# EAGLE board Bulk Board 4 (EAGLE 8.3.0)
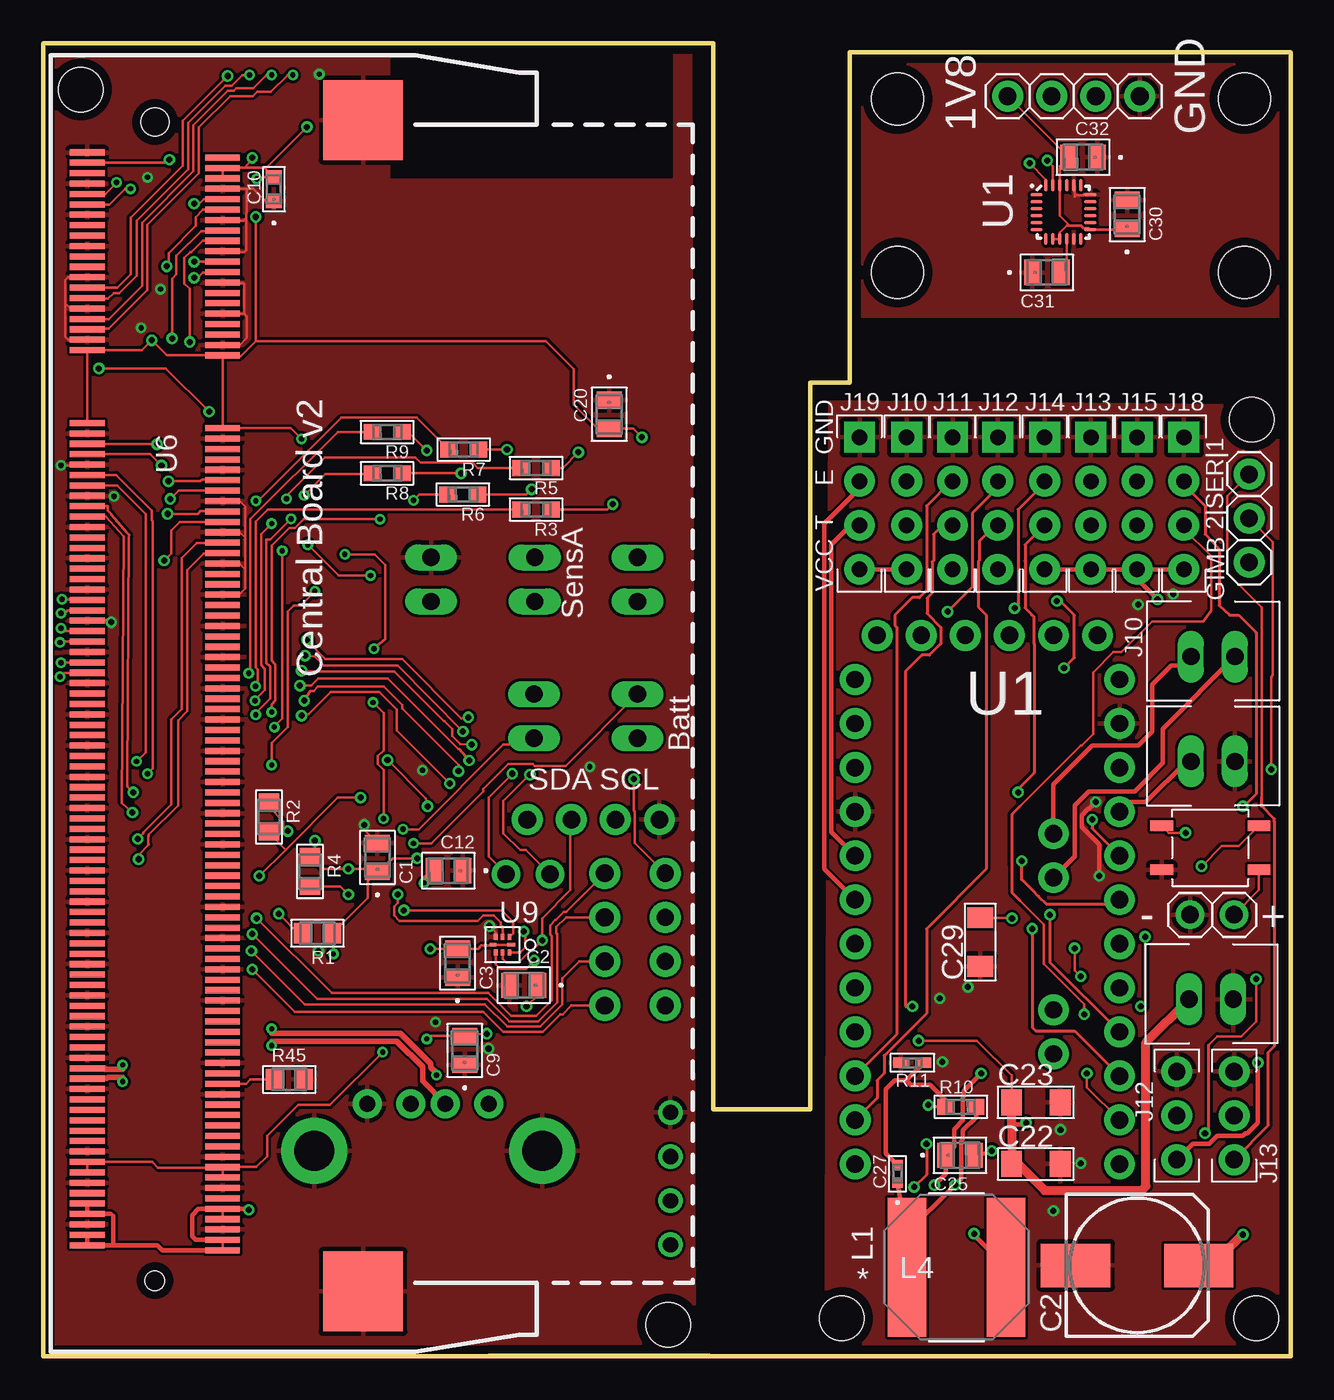
[diagram p0: board, top side]
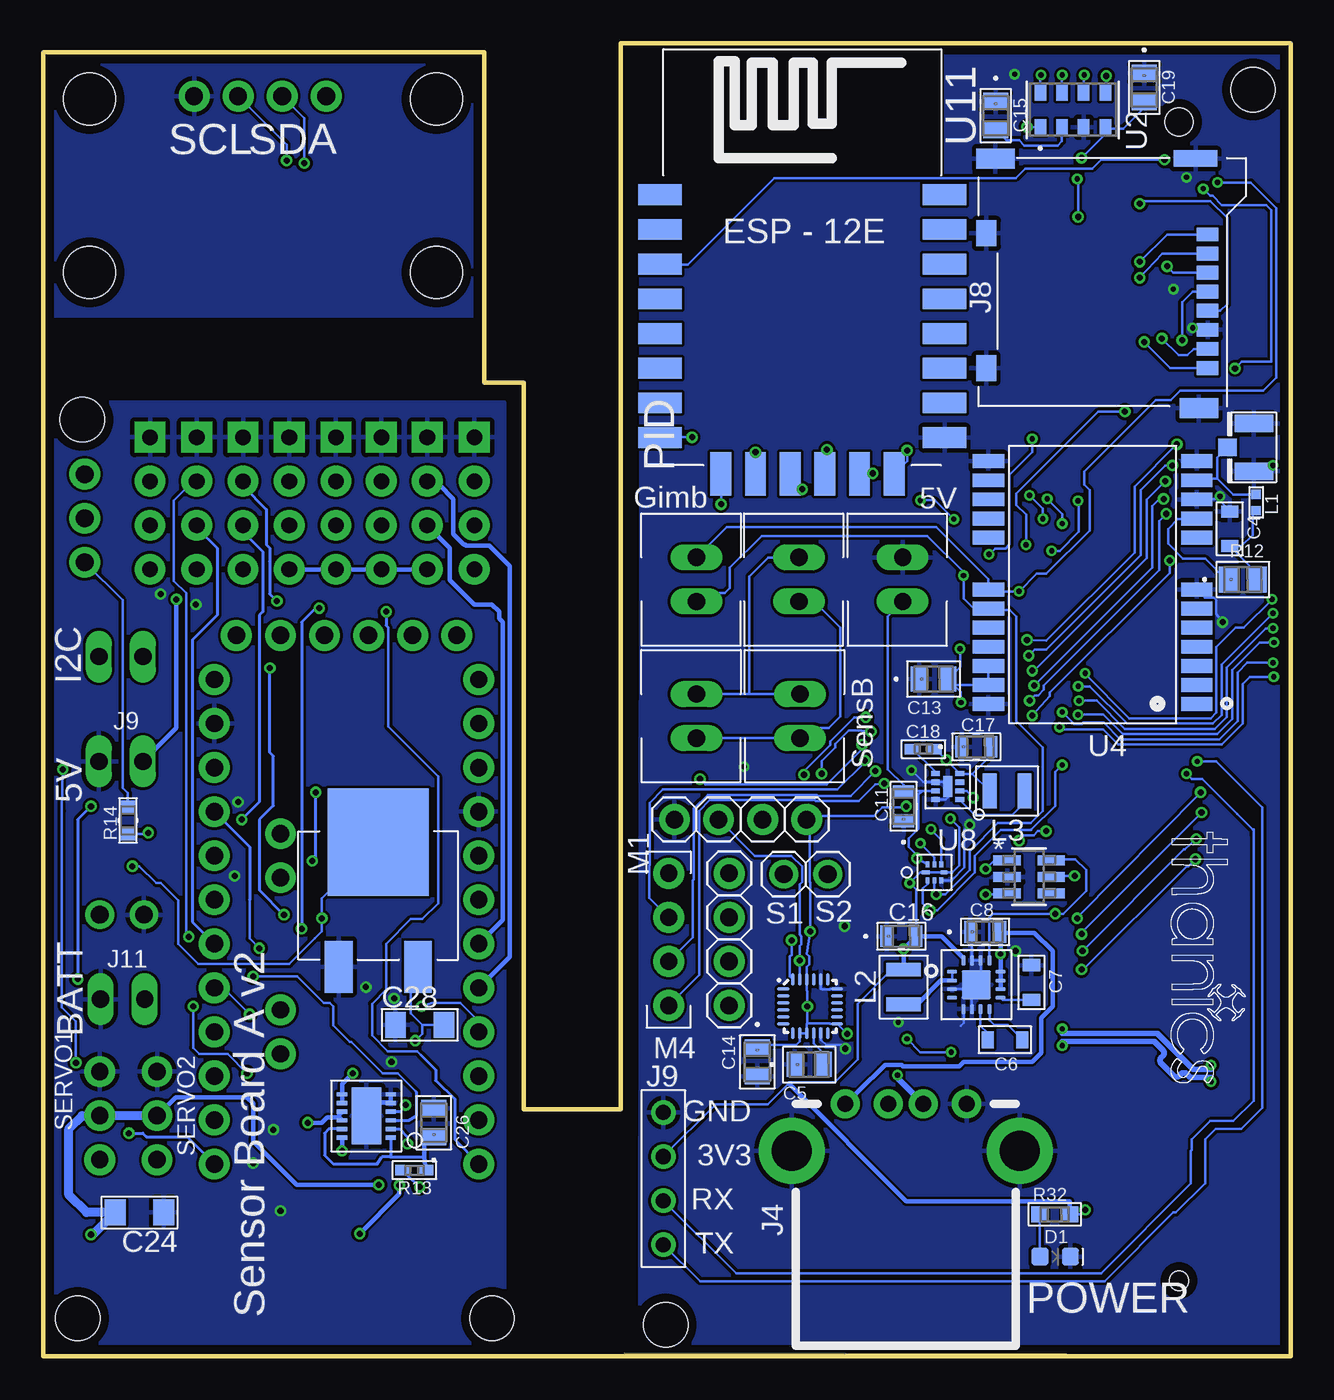
[diagram p1: board, bottom side, seen from below]

Size 71.88 x 75.69 mm. Coordinates in mm from the lower left corner, seen from the top.
Outline: 0.13,0.08 38.41,0.15
Outline: 0,0 71.88,0 71.88,75.18 46.48,75.18 46.48,56.13 44.2,56.13 44.2,14.22 38.61,14.22 38.61,75.69 0,75.69 0,0
Copper layers (1*16): Top 0.035mm / dielectric 1.6mm / Bottom 0.035mm
Design rules "Elecrow_2-layer_PCB_eagle_rule": minimum track width 6mil, minimum drill 12mil, track to track 6mil, track to pad 6mil, pad to pad 6mil, via to via 8mil, smd to smd 0mil, copper to edge 20mil, drill to drill 10mil, minimum pad ring 6mil, minimum via ring 6mil, stop-mask expansion 0mil, vias tented up to drill 100mil, thermal gap 10mil
Holes 2.54 mm at 36.02,1.8 2.16,73.03 69.9,2.18 69.65,54 46.02,2.18
Holes 3 mm at 49.23,72.48 49.23,62.48 69.23,72.48 69.23,62.48

## Footprints (pad centres in the part's own frame; a part is rotated, then mirrored left to right if it is on the bottom)
0805 = smd 0.965 x 1.448: 1 -0.826,0; 2 0.826,0
0603_CAPACITOR = smd 0.701 x 1.001: 1 -1.001,0; 2 1.001,0
G-21 = smd 0.711 x 1.245: 1 -0.851,0; 2 0.851,0
G-188-M = smd 0.813 x 0.914: 1 -0.699,0; 2 0.699,0
YAG_CC0805 = smd 0.965 x 1.448: 1 -0.826,0; 2 0.826,0
CC0402N-M = smd 0.864 x 0.61: 1 -0.635,0; 2 0.635,0
0810_POLCAP = smd 4 x 2.5: + 3.55,0; - -3.55,0
1206_MLCC = smd 1.2 x 1.5: P$1 -1.4,0; P$2 1.4,0
G-155-M = smd 0.559 x 0.61: 1 -0.521,0; 2 0.521,0
LED-0603 = smd 1 x 1: A -0.877,0; C 0.877,0
XH_CONNECTOR = drill 1.001 long: 1 -1.27,0; 2 1.27,0
USB_A_RECEPT = drill 0.92 pad 1.676: 1 -3.5,0; 2 -1,0; 3 1,0; 4 3.5,0 | drill 2.3 pad 3.81: 5 -6.57,-2.71; 6 6.57,-2.71
U.FL = smd 2.2 x 1: P$1 0,1.375; P$2 0,-1.375 | smd 1.05 x 1: P$3 1.525,0
MICROSD = smd 0.8 x 1.24: 1 -4.4,0; 2 -3.3,0; 3 -2.2,0; 4 -1.1,0; 5 0,0; 6 1.1,0; 7 2.2,0; 8 3.3,0 | smd 0.95 x 2.5: 9 -8.775,-0.7 | smd 1.15 x 2.2: 10 5.615,-0.5; 11 -8.775,-12.23 | smd 1.5 x 1.15: 12 -4.47,-12.755; 13 3.31,-12.775
4_PIN_TELE_CONNECTOR = drill 0.87 pad 1.422: 1 0,3.81; 2 0,1.27; 3 0,-1.27; 4 0,-3.81
HC-SR04_FOOTPRINT = drill 0.9 pad 1.778: ECHO 0,1.27; TRIG 0,-1.27; VCC 0,-3.81 | drill 0.9 pad 1.778 square: GND 0,3.81
SERVO_CONNECTOR = drill 1 pad 1.778: 1 0,2.54; 2 0,0; 3 0,-2.54
1X02 = drill 1.016 pad 1.651: 1 -1.27,0; 2 1.27,0
1X04 = drill 1.016 pad 1.778: 1 -3.81,0; 2 -1.27,0; 3 1.27,0; 4 3.81,0
1X03 = drill 1.016 pad 1.778: 1 -2.54,0; 2 0,0; 3 2.54,0
0402_INDUCTOR = smd 0.525 x 0.55: P$1 -0.463,0; P$2 0.463,0
470NH_INDUCTOR = smd 0.8 x 2: P$1 -1,0; P$2 1,0
IND_BOURNS_SRN8040 = smd 2.21 x 8.001: 1 -2.857,0; 2 2.857,0
RC0805N = smd 1.006 x 1.2: 1 -0.853,0; 2 0.853,0
RC0603N-M = smd 0.965 x 0.914: 1 -0.876,0; 2 0.876,0
RC0402N-M = smd 0.864 x 0.61: 1 -0.66,0; 2 0.66,0
STA_RNCP0805-M = smd 1.118 x 1.499: 1 -0.826,0; 2 0.826,0
RC0603N = smd 0.762 x 0.813: 1 -0.775,0; 2 0.775,0
QFN40P300X300X105-25N = smd 0.7 x 0.2: 1 -1.55,1; 2 -1.55,0.6; 3 -1.55,0.2; 4 -1.55,-0.2; 5 -1.55,-0.6; 6 -1.55,-1; 13 1.55,-1; 14 1.55,-0.6; 15 1.55,-0.2; 16 1.55,0.2; 17 1.55,0.6; 18 1.55,1 | smd 0.2 x 0.7: 7 -1,-1.55; 8 -0.6,-1.55; 9 -0.2,-1.55; 10 0.2,-1.55; 11 0.6,-1.55; 12 1,-1.55; 19 1,1.55; 20 0.6,1.55; 21 0.2,1.55; 22 -0.2,1.55; 23 -0.6,1.55; 24 -1,1.55
LGA8-M = smd 0.94 x 0.66: 1 -1.003,1.875; 2 -1.003,0.625; 3 -1.003,-0.625; 4 -1.003,-1.875; 5 1.003,-1.875; 6 1.003,-0.625; 7 1.003,0.625; 8 1.003,1.875
MF06A-M = smd 1.575 x 0.584: 1 -1.27,0.953; 2 -1.27,0; 3 -1.27,-0.953; 4 1.27,-0.953; 5 1.27,0; 6 1.27,0.953
NEO-M8 = smd 1.8 x 0.8: 1 6.4,-7.4; 2 6.4,-6.3; 3 6.4,-5.2; 4 6.4,-4.1; 5 6.4,-3; 6 6.4,-1.9; 7 6.4,-0.8; 8 6.4,2.2; 9 6.4,3.3; 10 6.4,4.4; 11 6.4,5.5; 12 6.4,6.6; 13 -5.6,6.6; 14 -5.6,5.5; 15 -5.6,4.4; 16 -5.6,3.3; 17 -5.6,2.2; 18 -5.6,-0.8; 19 -5.6,-1.9; 20 -5.6,-3; 21 -5.6,-4.1; 22 -5.6,-5.2; 23 -5.6,-6.3; 24 -5.6,-7.4
VQFN16 = smd 0.6 x 0.24: 1 -1.4,0.75; 2 -1.4,0.25; 3 -1.4,-0.25; 4 -1.4,-0.75; 9 1.4,-0.75; 10 1.4,-0.25; 11 1.4,0.25; 12 1.4,0.75 | smd 0.24 x 0.6: 5 -0.75,-1.4; 6 -0.25,-1.4; 7 0.25,-1.4; 8 0.75,-1.4; 13 0.75,1.4; 14 0.25,1.4; 15 -0.25,1.4; 16 -0.75,1.4 | smd 1.68 x 1.68: 17 0,0
SO-DIMM = smd 0.35 x 2: 1 -26.4,-3.9; 2 -26.1,3.9; 3 -25.8,-3.9; 4 -25.5,3.9; 5 -25.2,-3.9; 6 -24.9,3.9; 7 -24.6,-3.9; 8 -24.3,3.9; 9 -24,-3.9; 10 -23.7,3.9; 11 -23.4,-3.9; 12 -23.1,3.9; 13 -22.8,-3.9; 14 -22.5,3.9; 15 -22.2,-3.9; 16 -21.9,3.9; 17 -21.6,-3.9; 18 -21.3,3.9; 19 -21,-3.9; 20 -20.7,3.9; 21 -20.4,-3.9; 22 -20.1,3.9; 23 -19.8,-3.9; 24 -19.5,3.9; 25 -19.2,-3.9; 26 -18.9,3.9; 27 -18.6,-3.9; 28 -18.3,3.9; 29 -18,-3.9; 30 -17.7,3.9; 31 -17.4,-3.9; 32 -17.1,3.9; 33 -16.8,-3.9; 34 -16.5,3.9; 35 -16.2,-3.9; 36 -15.9,3.9; 37 -15.6,-3.9; 38 -15.3,3.9; 39 -15,-3.9; 40 -14.7,3.9; 41 -10.8,-3.9; 42 -10.5,3.9; 43 -10.2,-3.9; 44 -9.9,3.9; 45 -9.6,-3.9; 46 -9.3,3.9; 47 -9,-3.9; 48 -8.7,3.9; 49 -8.4,-3.9; 50 -8.1,3.9; 51 -7.8,-3.9; 52 -7.5,3.9; 53 -7.2,-3.9; 54 -6.9,3.9; 55 -6.6,-3.9; 56 -6.3,3.9; 57 -6,-3.9; 58 -5.7,3.9; 59 -5.4,-3.9; 60 -5.1,3.9; 61 -4.8,-3.9; 62 -4.5,3.9; 63 -4.2,-3.9; 64 -3.9,3.9; 65 -3.6,-3.9; 66 -3.3,3.9; 67 -3,-3.9; 68 -2.7,3.9; 69 -2.4,-3.9; 70 -2.1,3.9; 71 -1.8,-3.9; 72 -1.5,3.9; 73 -1.2,-3.9; 74 -0.9,3.9; 75 -0.6,-3.9; 76 -0.3,3.9; 77 0,-3.9; 78 0.3,3.9; 79 0.6,-3.9; 80 0.9,3.9; 81 1.2,-3.9; 82 1.5,3.9; 83 1.8,-3.9; 84 2.1,3.9; 85 2.4,-3.9; 86 2.7,3.9; 87 3,-3.9; 88 3.3,3.9; 89 3.6,-3.9; 90 3.9,3.9; 91 4.2,-3.9; 92 4.5,3.9; 93 4.8,-3.9; 94 5.1,3.9; 95 5.4,-3.9; 96 5.7,3.9; 97 6,-3.9; 98 6.3,3.9; 99 6.6,-3.9; 100 6.9,3.9; 101 7.2,-3.9; 102 7.5,3.9; 103 7.8,-3.9; 104 8.1,3.9; 105 8.4,-3.9; 106 8.7,3.9; 107 9,-3.9; 108 9.3,3.9; 109 9.6,-3.9; 110 9.9,3.9; 111 10.2,-3.9; 112 10.5,3.9; 113 10.8,-3.9; 114 11.1,3.9; 115 11.4,-3.9; 116 11.7,3.9; 117 12,-3.9; 118 12.3,3.9; 119 12.6,-3.9; 120 12.9,3.9; 121 13.2,-3.9; 122 13.5,3.9; 123 13.8,-3.9; 124 14.1,3.9; 125 14.4,-3.9; 126 14.7,3.9; 127 15,-3.9; 128 15.3,3.9; 129 15.6,-3.9; 130 15.9,3.9; 131 16.2,-3.9; 132 16.5,3.9; 133 16.8,-3.9; 134 17.1,3.9; 135 17.4,-3.9; 136 17.7,3.9; 137 18,-3.9; 138 18.3,3.9; 139 18.6,-3.9; 140 18.9,3.9; 141 19.2,-3.9; 142 19.5,3.9; 143 19.8,-3.9; 144 20.1,3.9; 145 20.4,-3.9; 146 20.7,3.9; 147 21,-3.9; 148 21.3,3.9; 149 21.6,-3.9; 150 21.9,3.9; 151 22.2,-3.9; 152 22.5,3.9; 153 22.8,-3.9; 154 23.1,3.9; 155 23.4,-3.9; 156 23.7,3.9; 157 24,-3.9; 158 24.3,3.9; 159 24.6,-3.9; 160 24.9,3.9; 161 25.2,-3.9; 162 25.5,3.9; 163 25.8,-3.9; 164 26.1,3.9; 165 26.4,-3.9; 166 26.7,3.9; 167 27,-3.9; 168 27.3,3.9; 169 27.6,-3.9; 170 27.9,3.9; 171 28.2,-3.9; 172 28.5,3.9; 173 28.8,-3.9; 174 29.1,3.9; 175 29.4,-3.9; 176 29.7,3.9; 177 30,-3.9; 178 30.3,3.9; 179 30.6,-3.9; 180 30.9,3.9; 181 31.2,-3.9; 182 31.5,3.9; 183 31.8,-3.9; 184 32.1,3.9; 185 32.4,-3.9; 186 32.7,3.9; 187 33,-3.9; 188 33.3,3.9; 189 33.6,-3.9; 190 33.9,3.9; 191 34.2,-3.9; 192 34.5,3.9; 193 34.8,-3.9; 194 35.1,3.9; 195 35.4,-3.9; 196 35.7,3.9; 197 36,-3.9; 198 36.3,3.9; 199 36.6,-3.9; 200 36.9,3.9 | smd 4.6 x 4.6: G1 -28.254,12; G2 39.27,12 | hole 1.6: -28.15,0 | hole 1.1: 38.65,0
MLF(ML)_8PIN = smd 0.5 x 0.3: 1 -0.7,0.75; 2 -0.7,0.25; 3 -0.7,-0.25; 4 -0.7,-0.75; 5 0.7,-0.75; 6 0.7,-0.25; 7 0.7,0.25; 8 0.7,0.75 | smd 0.5 x 1.2: EP 0,0
8-UMLP = smd 0.45 x 0.22: 1 -0.5,0 | smd 0.22 x 0.35: 2 -0.4,-0.45; 3 0,-0.45; 4 0.4,-0.45; 6 0.4,0.45; 7 0,0.45; 8 -0.4,0.45 | smd 0.35 x 0.22: 5 0.55,0
PRO-MINI-2 = drill 1 pad 1.778: A0 6.35,2.54; A1 6.35,0; A2 6.35,-2.54; A3 6.35,-5.08; A4 2.54,1.27; A5 2.54,3.81; A6 2.54,-8.89; A7 2.54,-6.35; D2 -8.89,2.54; D3 -8.89,0; D4 -8.89,-2.54; D5 -8.89,-5.08; D6 -8.89,-7.62; D7 -8.89,-10.16; D8 -8.89,-12.7; D9 -8.89,-15.24; D10 6.35,-15.24; D11 6.35,-12.7; D12 6.35,-10.16; D13 6.35,-7.62; DTR 5.08,15.24; GND 6.35,10.16; GND1 -8.89,5.08; GND2 -7.62,15.24; GND3 -5.08,15.24; RAW 6.35,12.7; RST 6.35,7.62; RST1 -8.89,7.62; RX1 -8.89,10.16; RX1-1 0,15.24; TX0 -8.89,12.7; TX0-1 2.54,15.24; VCC 6.35,5.08; VCC1 -2.54,15.24
ESP12E-SMD = smd 2.5 x 1.2: ADC -8.3,3.8; CH_PD -8.3,1.8; GND 8.1,-8.2; GPIO0 8.1,-2.2; GPIO2 8.1,-4.2; GPIO4 8.1,-0.2; GPIO5 8.1,1.8; GPIO12 -8.3,-4.2; GPIO13 -8.3,-6.2; GPIO14 -8.3,-2.2; GPIO15 8.1,-6.2; GPIO16 -8.3,-0.2; RESET -8.3,5.8; RXD0 8.1,3.8; TXD0 8.1,5.8; VCC -8.3,-8.2 | smd 1.2 x 2.5: CS0 -4.8,-10.3; GPIO9 -0.8,-10.3; GPIO10 1.2,-10.3; MISO -2.8,-10.3; MOSI 3.2,-10.3; SCLK 5.2,-10.3
12LD4X3DFN = smd 0.6 x 0.25: 1 -1.4,1.25; 2 -1.4,0.75; 3 -1.4,0.25; 4 -1.4,-0.25; 5 -1.4,-0.75; 6 -1.4,-1.25; 7 1.4,-1.25; 8 1.4,-0.75; 9 1.4,-0.25; 10 1.4,0.25; 11 1.4,0.75; 12 1.4,1.25 | smd 1.7 x 3.3: EP 0,0
4-SOP = smd 1.3 x 0.6: 1 -2.8,1.27; 2 -2.8,-1.27; 3 2.8,-1.27; 4 2.8,1.27
DPAK = smd 1.6 x 3: 1 -2.285,0; 3 2.285,0 | smd 5.8 x 6.2: 2 0,7.18
4_PIN_CONNECTOR = drill 1 pad 1.778: 1 0,3.81; 2 0,1.27; 3 0,-1.27; 4 0,-3.81

## Placement (x,y rotation side)
C1  0.1uF  [0805]  19.25,28.75 90 top
C2  0.1uF  [0805]  27.69,21.39 180 top
C3  0.1uF  [0805]  23.88,22.66 90 top
C4  10nF  [0603_CAPACITOR]  3.51,47.7 270 bottom
C5  0.1uF  [0805]  27.74,16.81 0 bottom
C6  10nF  [0603_CAPACITOR]  16.46,18.24 180 bottom
C7  10nF  [0603_CAPACITOR]  14.94,21.54 270 bottom
C8  10uF  [G-21]  17.6,24.46 0 bottom
C9  0.1uF  [0805]  24.28,17.63 90 top
C10  2.2uF  [G-188-M]  13.28,67.28 90 top
C11  10uF  [G-21]  22.3,31.7 90 bottom
C12  0.1uF  [0805]  23.34,27.99 180 top
C13  0.1uF  [0805]  20.57,39.04 0 bottom
C14  0.1uF  [0805]  30.73,16.97 270 bottom
C15  1uF  [YAG_CC0805]  16.99,71.53 270 bottom
C16  22uF  [G-21]  22.43,24.21 0 bottom
C17  10uF  [G-21]  18.11,35.13 0 bottom
C18  560pF  [CC0402N-M]  21.16,35 0 bottom
C19  1uF  [YAG_CC0805]  8.43,73.15 270 bottom
C20  0.1uF  [0805]  32.61,54.31 270 top
C21  100uF  [0810_POLCAP]  63.04,5.23 0 top
C22  10uF  [1206_MLCC]  57.2,11.07 0 top
C23  10uF  [1206_MLCC]  57.2,14.63 0 top
C24  10uF  [1206_MLCC]  66.34,8.28 180 bottom
C25  0.1uF  [0805]  52.83,11.58 0 top
C26  0.1uF  [0805]  49.38,13.46 90 bottom
C27  16pF  [G-155-M]  49.23,10.52 90 top
C28  10uF  [1206_MLCC]  50.19,19.1 0 bottom
C29  10uF  [1206_MLCC]  54,23.88 90 top
C30  0.1uF  [0805]  62.47,65.82 90 top
C31  0.1uF  [0805]  57.84,62.48 0 top
C32  0.1uF  [0805]  59.93,69.12 180 top
D1  GREEN  [LED-0603]  13.56,5.74 0 bottom
J1  POWER_CONNECTOR  [XH_CONNECTOR]  22.35,44.78 90 bottom
J2  I2C_CONNECTOR  [XH_CONNECTOR]  28.32,44.78 90 bottom
J3  I2C_CONNECTOR  [XH_CONNECTOR]  34.24,36.91 90 bottom
J4  USB_A_RECEPT  [USB_A_RECEPT]  22.17,14.55 0 bottom
J5  U.FL  [U.FL]  2.11,52.4 180 bottom
J6  I2C_CONNECTOR  [XH_CONNECTOR]  28.27,36.91 90 bottom
J7  I2C_CONNECTOR  [XH_CONNECTOR]  34.24,44.78 90 bottom
J8  MICROSD  [MICROSD]  4.78,60.27 270 bottom
J9  4_PIN_TELE_CONNECTOR  [4_PIN_TELE_CONNECTOR]  36.14,10.24 180 bottom
J10  HC-SR04  [HC-SR04_FOOTPRINT]  49.76,49.17 0 top
J11  HC-SR04  [HC-SR04_FOOTPRINT]  52.4,49.17 0 top
J12  HC-SR04  [HC-SR04_FOOTPRINT]  55.02,49.17 0 top
J13  HC-SR04  [HC-SR04_FOOTPRINT]  60.38,49.17 0 top
J14  HC-SR04  [HC-SR04_FOOTPRINT]  57.71,49.17 0 top
J15  HC-SR04  [HC-SR04_FOOTPRINT]  63.04,49.17 0 top
J16  POWER_CONNECTOR  [XH_CONNECTOR]  67.41,34.29 0 top
J17  I2C_CONNECTOR  [XH_CONNECTOR]  67.41,40.34 0 top
J18  HC-SR04  [HC-SR04_FOOTPRINT]  65.74,49.17 0 top
J19  HC-SR04  [HC-SR04_FOOTPRINT]  47.04,49.17 0 top
J20  SERVO_CONNECTOR  [SERVO_CONNECTOR]  68.63,13.87 180 top
J21  SERVO_CONNECTOR  [SERVO_CONNECTOR]  65.33,13.87 180 top
J22  GIMBAL_POWER_CONNECTOR  [XH_CONNECTOR]  67.31,20.57 0 top
JP1  [1X02]  27.94,27.79 0 bottom
JP2  [1X04]  32.36,24.03 270 bottom
JP3  [1X04]  31.7,30.94 180 bottom
JP4  [1X02]  67.36,25.45 180 top
JP5  [1X03]  69.49,48.31 270 top
JP6  [1X04]  59.39,72.64 0 top
L1  27 nH  [0402_INDUCTOR]  1.98,49.23 270 bottom
L2  470nH  [470NH_INDUCTOR]  22.3,21.29 90 bottom
L3  470nH  [470NH_INDUCTOR]  16.33,32.59 180 bottom
L4  3.3uH  [IND_BOURNS_SRN8040]  52.63,5.13 0 top
R1  10k  [RC0805N]  15.8,24.38 180 top
R2  10k  [RC0805N]  13,31.09 270 top
R3  20R  [RC0603N-M]  28.4,48.82 180 top
R4  10k  [RC0805N]  15.37,27.94 270 top
R5  20R  [RC0603N-M]  28.4,51.21 180 top
R6  20R  [RC0603N-M]  24.18,49.68 180 top
R7  20R  [RC0603N-M]  24.23,52.27 180 top
R8  20R  [RC0603N-M]  19.81,50.9 180 top
R9  20R  [RC0603N-M]  19.81,53.29 180 top
R10  499k  [RC0603N-M]  52.88,14.38 0 top
R11  95.3k  [RC0402N-M]  50.09,16.92 180 top
R12  10  [STA_RNCP0805-M]  2.74,44.78 0 bottom
R13  95.3k  [RC0402N-M]  50.5,10.72 180 bottom
R14  340R  [RC0603N]  67.01,30.89 90 bottom
R32  20R  [RC0603N-M]  13.59,8.18 0 bottom
R45  10k  [RC0805N]  14.17,15.95 0 top
U1  [QFN40P300X300X105-25N]  27.69,20.17 0 bottom
U2  [LGA8-M]  12.55,71.86 90 bottom
U3  LM3880MF-1AA/NOPBMF06A-M  [MF06A-M]  15.06,27.64 0 bottom
U4  NEO-M8  [NEO-M8]  11.81,45 0 bottom
U5  TPS6209  [VQFN16]  18.11,21.41 0 bottom
U6  [SO-DIMM]  6.43,43 270 top
U7  MIC23050  [MLF(ML)_8PIN]  19.76,32.84 180 bottom
U8  [8-UMLP]  20.52,27.89 0 bottom
U9  [8-UMLP]  26.47,23.72 180 top
U10  PRO-MINI-2  [PRO-MINI-2]  55.68,26.31 0 top
U11  [ESP12E-SMD]  28.04,61.16 0 bottom
U12  [12LD4X3DFN]  53.26,13.85 180 bottom
U13  [4-SOP]  67.26,29.31 0 top
U14  [DPAK]  52.58,22.45 0 bottom
U15  [QFN40P300X300X105-25N]  58.79,65.96 0 top
U$12  4_PIN_CONNECTOR  [4_PIN_CONNECTOR]  35.84,24.03 0 bottom

## Library data of the parts
C1-C3 C5 C9 C12-C14 C20 C25 C26 C30-C32 = 0.1uF X7R Ceramic Capacitor; COPYRIGHT: Copyright C 2015 Accelerated Designs. All rights reserved; MANUFACTURER_PART_NUMBER: 08055C104KAT2A; VENDOR: Vendor
C4 C6 C7 C21-C24 C28 C29 J1-J4 J6-J9 J16 J17 J20-J22 L1-L3 U5 U7-U9 U12-U14 U$12 = thanics_robotics
C8 C11 C17 = 10uF X5R Ceramic Capacitor; COPYRIGHT: Copyright C 2015 Accelerated Designs. All rights reserved; MANUFACTURER_PART_NUMBER: GRM21BR60J106ME19L; VENDOR: Vendor
C10 = 2.2uF X5R Capacitor; COPYRIGHT: Copyright C 2015 Accelerated Designs. All rights reserved; MANUFACTURER_PART_NUMBER: GRM188R61C225KE15J; VENDOR: Vendor
C15 C19 = 1uF X7R Ceramic Capacitor; COPYRIGHT: Copyright C 2015 Accelerated Designs. All rights reserved; MANUFACTURER_PART_NUMBER: CC0805KKX7R7BB105; VENDOR: Vendor
C16 = 22uF X5R Ceramic Capacitor; COPYRIGHT: Copyright C 2015 Accelerated Designs. All rights reserved; MANUFACTURER_PART_NUMBER: GRM21BR60J226ME39L; VENDOR: Vendor
C18 = 560pF-capacitor; MANUFACTURER_PART_NUMBER: CC0402KRX7R9BB561; VENDOR: Yageo
C27 = 16pF-capacitor; MANUFACTURER_PART_NUMBER: GRM1555C1H160JA01D; VENDOR: Murata
D1 = SparkFun-LED; PROD_ID: DIO-00821
J5 = SparkFun-Connectors; PROD_ID: CONN-09193; SF_ID: WRL-09144
J10-J15 J18 J19 = Ultrasonic Sensor HC-SR04
JP1-JP6 = pinhead
L4 = 3.3uH-inductor
R1 R2 R4 R45 = 10k-resistor; CASE: 0805 2012 metric; COMPOSITION: Thin Film; COPYRIGHT: Copyright C 2015 Accelerated Designs. All rights reserved; DATASHEET: httpindustrial.panasonic.comwwwcgijvcr13pz.cgi?E+PZ+3+AOA0026+ERA6AEB103V+7+WW; DIGIKEYPARTNUMBER: P10KDATRND; HEIGHT: 0.024" 0.60mm; LEADSTYLE: Surface Mount SMD SMT; MANUFACTURER_PART_NUMBER: ERA6AEB103V; NUMBEROFTERMINATIONS: 2; PACKAGECASE: 0805 2012 Metric; PACKAGING: Tape &amp Reel TR; POWERWATTS: 0.125W 18W; QUANTITY_AVAILABLE: 225000; RESISTANCEINOHMS: 10.0K; RESISTANCEOHMS: 10K; SIZEDIMENSION: 0.079" L x 0.049" W 2.00mm x 1.25mm; TEMPERATURECOEFFICIENT: 25ppm°C; TOLERANCE: 0.1%; VENDOR: Panasonic; VOLTAGEWORKING: 100V
R3 R5-R9 R32 = 20-resistor; MANUFACTURER_PART_NUMBER: RC0603JR0720RL; VENDOR: Yageo
R10 = 499k-resistor; MANUFACTURER_PART_NUMBER: RC0603FR07499KL; VENDOR: Yageo
R11 R13 = 95.3k-resistor; MANUFACTURER_PART_NUMBER: RC0402FR0795K3L; VENDOR: Yageo
R12 = 10-resistor; COPYRIGHT: Copyright C 2015 Accelerated Designs. All rights reserved; MANUFACTURER_PART_NUMBER: RNCP0805FTD10R0; VENDOR: Vendor
R14 = 340-resistor; CASE: 0603 1608 metric; COMPOSITION: Thick Film; COPYRIGHT: Copyright C 2015 Accelerated Designs. All rights reserved; DATASHEET: httpwww.yageo.comdocumentsrecentPYuRC0603_51_RoHS_L_4.pdf; DIGIKEYPARTNUMBER: 311340HRTRND; HEIGHT: 0.022" 0.55mm; LEADSTYLE: Surface Mount SMD SMT; MANUFACTURER_PART_NUMBER: RC0603FR07340RL; NEWARKPARTNUMBER: 66R2325; NUMBEROFTERMINATIONS: 2; PACKAGECASE: 0603 1608 Metric; PACKAGING: Tape &amp Reel TR; POWERWATTS: 0.1W 110W; QUANTITY_AVAILABLE: 95000; RESISTANCEINOHMS: 340; RESISTANCEOHMS: 340; SIZEDIMENSION: 0.063" L x 0.031" W 1.60mm x 0.80mm; TEMPERATURECOEFFICIENT: 100ppm°C; TOLERANCE: 1%; VENDOR: Yageo; VOLTAGEWORKING: 50V
U1 U15 = ICM-20948-mpu
U2 = mpl115a1-barometer; MANUFACTURER_PART_NUMBER: mpl115a1; VENDOR: Freescale
U3 = LM3880MF; MANUFACTURER_PART_NUMBER: lm3880mf1aaNOPB; VENDOR: National Semiconductor
U4 = ubloxLib
U6 = raspberrypi_cm
U10 = Arduino-clone
U11 = esp8266modules

## Nets
1.8V: C2.1 C9.2 C14.1 C17.2 C18.2 JP3.1 L3.P$2 U1.8 U1.9 U1.13 U1.22 U6.183 U6.184 U6.185 U6.186 U7.4 U9.8
1.8V1: C30.1 C32.2 JP6.1 U15.8 U15.9 U15.13 U15.22
+3V3: C3.2 C10.2 C12.2 C13.2 C16.2 C19.2 C20.2 J8.4 J9.3 L2.P$2 R32.2 U2.1 U2.4 U4.22 U4.23 U5.16 U6.4 U6.6 U6.39 U6.40 U6.41 U6.42 U6.191 U6.192 U6.193 U6.194 U6.197 U6.198 U6.199 U6.200 U8.1 U8.5 U9.1 U9.5 U11.VCC
+5V: C1.1 C8.2 C11.2 J1.1 J4.1 R1.1 R2.1 R4.1 U3.1 U5.10 U5.11 U5.12 U7.7 U8.8
+5V1: J10.VCC J11.VCC J12.VCC J13.VCC J14.VCC J15.VCC J16.1 J18.VCC J19.VCC U10.VCC U12.3
+12V: C29.P$2 U13.4 U14.2
ECHO1: J19.ECHO U10.D3
ECHO2: J10.ECHO U10.D5
ECHO3: J11.ECHO U10.D7
ECHO4: J12.ECHO U10.D9
ECHO5: J13.ECHO U10.D13
ECHO6: J14.ECHO U10.D12
ECHO7: J15.ECHO U10.D11
ECHO8: J18.ECHO U10.D10
EMMC_DISABLE_N: U6.2
GIMBAL: JP5.3 R14.2
GND: C1.2 C2.2 C3.1 C4.1 C5.1 C7.1 C8.1 C9.1 C10.1 C11.1 C12.1 C13.1 C14.2 C15.1 C16.1 C17.1 C19.1 C20.1 D1.C J1.2 J4.4 J4.5 J4.6 J5.P$1 J5.P$2 J8.6 J8.9 J8.10 J8.11 J8.12 J8.13 J9.4 JP3.4 R45.2 U1.11 U1.18 U1.20 U2.3 U3.2 U4.7 U4.10 U4.12 U4.13 U4.24 U5.3 U5.5 U5.6 U5.14 U5.15 U5.17 U6.1 U6.7 U6.8 U6.13 U6.14 U6.19 U6.20 U6.25 U6.26 U6.31 U6.32 U6.37 U6.38 U6.43 U6.44 U6.49 U6.50 U6.55 U6.56 U6.61 U6.62 U6.67 U6.68 U6.73 U6.74 U6.79 U6.80 U6.85 U6.86 U6.91 U6.92 U6.97 U6.98 U6.103 U6.104 U6.109 U6.110 U6.115 U6.116 U6.121 U6.122 U6.127 U6.133 U6.134 U6.139 U6.140 U6.145 U6.146 U6.151 U6.152 U6.157 U6.163 U6.164 U6.169 U6.170 U6.181 U6.182 U6.187 U6.188 U6.195 U6.196 U6.G1 U6.G2 U7.6 U7.8 U7.EP U8.4 U9.4 U11.GND
GND1: C21.- C22.P$2 C23.P$2 C24.P$1 C26.2 C28.P$1 C29.P$1 J10.GND J11.GND J12.GND J13.GND J14.GND J15.GND J16.2 J18.GND J19.GND J20.3 J21.3 J22.2 JP4.2 R11.2 U10.GND U10.GND1 U12.5 U12.6 U12.EP U13.2 U14.1
GND2: C30.2 C31.1 C32.1 JP6.4 U15.11 U15.18 U15.20
I2C_SCL: J7.1 U4.19 U6.11 U8.3 U9.3
I2C_SCL_1V1: JP6.3 U15.23
I2C_SCL_1V8: JP3.3 U1.23 U9.6
I2C_SCL_5V: J2.1 J3.1 J6.1 U8.6
I2C_SDA: J7.2 U4.18 U6.9 U8.2 U9.2
I2C_SDA_1V1: JP6.2 U15.24
I2C_SDA_1V8: JP3.2 U1.24 U9.7
I2C_SDA_5V: J2.2 J3.2 J6.2 U8.7
ID_SD: U6.3 U11.CH_PD
LED1: JP2.1 U6.57
LED2: JP2.2 U6.59
LED3: JP2.3 U6.64
LED4: JP2.4 U6.66
MOTOR1: U6.52 U$12.1
MOTOR2: U6.54 U$12.2
MOTOR3: U6.58 U$12.3
MOTOR4: U6.60 U$12.4
N$1: J5.P$3 L1.P$1 U4.11
N$2: C6.2 U5.7
N$3: C6.1 U5.8
N$4: D1.A R32.1
N$5: R1.2 U3.6 U5.13
N$6: R2.2 U3.5 U7.2
N$7: R3.1 U11.CS0
N$8: R5.1 U11.MISO
N$9: R6.1 U11.GPIO9
N$10: R7.1 U11.GPIO10
N$11: C5.2 U1.10
N$12: C15.2 U2.2
N$13: R12.1 U4.9
N$14: R8.1 U11.MOSI
N$15: R9.1 U11.SCLK
N$16: C27.2 R10.1 R11.1 U12.4
N$17: C25.2 U12.12
N$18: C25.1 L4.2 U12.7 U12.8
N$19: R13.2 U12.2
N$20: R14.1 U13.1
N$21: JP4.1 U13.3
N$22: C31.2 U15.10
N$26: C4.2 L1.P$2 R12.2
N$29: C7.2 U5.9
N$30: L2.P$1 U5.1 U5.2
N$32: L3.P$1 U7.1
N$48: C18.1 U7.5
N$53: R45.1 U6.168
POWER_SEQ_EN: R4.2 U3.3
SCL: J17.1 U10.A5
SD_CLK: R9.2 U6.75
SD_CMD: R3.2 U6.77
SD_D0: R5.2 U6.81
SD_D1: R8.2 U6.83
SD_D2: R6.2 U6.87
SD_D3: R7.2 U6.89
SDA: J17.2 U10.A4
SDX_CLK: J8.5 U6.10
SDX_CMD: J8.3 U6.12
SDX_D0: J8.7 U6.16
SDX_D1: J8.8 U6.18
SDX_D2: J8.1 U6.22
SDX_D3: J8.2 U6.24
SERVO1: JP1.1 U6.45
SERVO2: JP1.2 U6.47
SERVO3: J21.1 JP5.2
SERVO4: J20.1 JP5.1
SPI_CS0: U2.5 U6.27
SPI_CS1: U6.23
SPI_MISO: U2.6 U6.29
SPI_MOSI: U2.7 U6.33
SPI_SCLK: U2.8 U6.35
TRIG1: J19.TRIG U10.D2
TRIG2: J10.TRIG U10.D4
TRIG3: J11.TRIG U10.D6
TRIG4: J12.TRIG U10.D8
TRIG5: J13.TRIG U10.A0
TRIG6: J14.TRIG U10.A1
TRIG7: J15.TRIG U10.A2
TRIG8: J18.TRIG U10.A3
UART2_RX: U6.72
UART2_TX: U6.70
UART_RX: J9.1 U6.53
UART_TX: J9.2 U6.51
USB_D_N: J4.2 U6.167
USB_D_P: J4.3 U6.165
V_BATT: C22.P$1 C23.P$1 C28.P$2 J22.1 U12.9 U12.10 U14.3
VDD: C26.1 R13.1 U12.1 U12.11
VOUT: C21.+ C24.P$2 C27.1 J20.2 J21.2 L4.1 R10.2

## Tracks (layer width: path | path; a pad name or v marks a point on that pad's centre or on a via)
1.8V  (via drill 0.3, 0.35)
  Top 0.152: U6.185 U6.183 6.27,11.2 6.6,10.87 10.29,10.87 U6.184 | U6.186 U6.184 | v25.55,18.59 24.98,18.55 C9.2 22.26,18.45 v22.1,18.29 | C2.1 28.51,20.84 v27.85,20.17 | U9.8 27.49,23.27 27.79,23.57 27.79,24.38 v27.69,24.49 | v22.15,31.7 22.05,32.16 v19.84,34.37 | U6.184 12.27,10.9 12.9,11.53 12.9,12.7 14.68,14.48 16.51,14.48 v19.56,17.53
  Bottom 0.152: L3.P$2 17.35,32.59 18.34,33.58 | 18.34,33.58 19.05,33.58 U7.4 v19.84,34.37 20.47,35 C18.2 | 18.34,33.58 17.26,34.66 C17.2 17.23,35.15 | v25.55,18.59 v25.56,18.59 U1.13 26.52,19.17 26.55,19.2 27.85,19.2 | C14.1 30.59,17.93 28.5,17.93 28.29,18.14 U1.8 U1.9 27.89,19.15 27.85,19.2 | 27.85,19.2 v27.85,20.17 27.85,21.04 27.89,21.08 U1.22 27.89,22.43 27.74,22.58 27.74,23.04 27.89,23.19 v27.69,24.49 27.69,27.31 | v22.15,31.7 22.15,31.65 23.52,31.65 24.03,31.14 27.69,31.14 JP3.1 27.72,30.77 27.72,27.35 | v19.56,17.53 21.34,17.53 v22.1,18.29 | 27.69,27.31 27.72,27.35 | 27.69,27.31 27.72,27.35
1.8V1
  Top 0.152: JP6.1 C32.2 58.59,68.61 U15.22 58.59,65.76 59.16,65.18 | C30.1 62.43,64.96 U15.13 60.26,65.04 59.95,65.04 59.81,65.18 59.16,65.18 | U15.8 U15.9 58.59,64.78 58.98,65.18 59.16,65.18
+3V3  (via drill 0.3, 0.35)
  Top 0.152: U6.194 U6.192 10.31,8.48 9.6,8.48 | 2.53,6.91 U6.197 | U6.198 U6.200 | 8.94,8.48 9.04,8.48 | v12.04,69.09 12.04,68.99 11.58,68.53 | 11.58,68.53 10.35,68.53 U6.4 U6.6 | 11.58,68.53 12.74,68.53 | 12.74,68.53 C10.2 12.41,67.98 v12.29,67.87 | 12.74,68.53 12.85,68.53 v15.19,70.87 | U6.40 7.12,57.7 v6.25,58.57 5.68,58 U6.39 U6.41 | 12.24,58.52 11.38,57.66 10.37,57.66 U6.40 | U6.40 U6.42 14.26,53.5 v14.88,52.88 | v19.05,40.79 19.71,41.35 19.71,45.62 19.11,46.23 v17.37,46.23 | v21.95,27.28 21.95,27.62 C12.2 | v19,37.69 19.61,37.08 19.61,34.93 19.28,34.6 19.28,34.14 19.61,33.81 v19.61,30.99 | U9.1 U9.5 25.87,23.68 25.86,23.68 25.86,23.67 25.25,23.67 25.06,23.48 C3.2 v22.3,23.48 | 12.24,58.52 v12.24,65.68 | 12.24,58.52 28.96,58.52 30.58,56.9 30.58,54.86 31.97,53.48 C20.2 34,53.48 v34.49,52.98
  Top 0.254: U6.192 11.77,8.5 v11.84,8.43 | U6.198 8.79,6.7 8.58,6.91 8.58,8.13 8.94,8.48 | 9.04,8.48 9.6,8.48 | U6.200 6.85,6.1 6.55,6.4 4.01,6.4 | 4.01,6.4 U6.199 2.53,6.91 | 4.01,6.4 4.01,8.08 3.89,8.2 U6.193 U6.191
  Bottom 0.152: 18.86,22.98 U5.16 | R32.2 12.09,8.18 v11.84,8.43 | C19.2 8.43,71.98 9.65,70.76 10.58,70.76 U2.4 10.67,70.45 v12.04,69.09 | v15.19,70.87 14.43,70.87 U2.1 | v6.25,58.57 6.25,60.76 5.64,61.37 J8.4 | C13.2 19.41,38.7 U4.23 U4.22 | v19.05,40.79 19.05,39.74 C13.2 | C16.2 21.58,26.91 v21.95,27.28 21.34,27.89 U8.1 U8.5 19.51,27.89 19.1,28.3 19.1,30.48 v19.61,30.99 | v19,37.69 19,38.29 C13.2 | v12.24,65.68 12.24,67.82 v12.29,67.87 | L2.P$2 22.98,22.29 24.94,20.32 24.94,17.12 26.26,15.8 28.85,15.8 28.93,15.72 30.12,14.53 33.12,14.53 J9.3 | v34.49,52.98 36.32,52.98 U11.VCC | v14.88,52.88 14.88,52.12 16.21,50.8 16.21,46.78 16.42,46.57 17.03,46.57 v17.37,46.23
  Bottom 0.254: R32.2 12.71,8.94 22.14,8.94 28.93,15.72 | 18.86,22.98 20.09,24.21 C16.2 v22.3,23.48 L2.P$2
+5V  (via drill 0.3, 0.35)
  Top 0.152: C1.1 19.09,28.09 v17.58,28.09 16.07,28.09 R4.1 15.65,29.07 v15.65,29.72 | v21.54,28.7 20.13,28.7 C1.1 | C1.1 18.69,27.37 18.69,26.43 R1.1 16.71,24.32 v16.71,23.19 | v14.08,30.28 13.83,30.53 13.83,30.83 13,31.66 R2.1
  Bottom 0.152: 21.23,32.59 U7.7 | 21.23,32.59 22.26,32.59 C11.2 22.3,32.92 23.22,33.83 23.22,42.65 J1.1 | U3.1 17.08,28.59 v17.58,28.09 | U8.8 v21.54,28.7 21.54,28.91 22,29.36 22,29.85 21.45,30.4 21.45,32.38 21.23,32.59 | v14.08,30.28 14.55,30.28 14.81,30.02 15.34,30.02 v15.65,29.72 | 16.71,23.06 v16.71,23.19
  Bottom 0.254: U5.10 U5.11 U5.12 16.71,23.06 | J4.1 23.62,16.53 23.36,16.79 22.42,16.79 22.34,16.71 19.1,16.71 18.85,16.97 14.88,16.97 14.38,17.48 14.38,19.51 13.72,20.17 13.72,23.37 14.76,24.41 16.7,24.41 C8.2 16.71,24.42 v16.71,23.19
+5V1  (via drill 0.35)
  Top 0.152: v59.44,23.52 59.44,22.25 v59.79,21.89
  Top 0.254: J19.VCC J10.VCC | J15.VCC J13.VCC J14.VCC | J15.VCC 63.04,44.81 v64.22,43.63 | J16.1 65.89,34.29 63.55,31.95 62.59,31.95 U10.VCC | J15.VCC J18.VCC
  Bottom 0.152: 59.99,26.31 59.99,24.08 v59.44,23.52 | v59.79,21.89 57.25,21.89 55.73,20.37 55.37,20.37 55.17,20.17 55.17,19.08 54.21,18.12 54.14,18.12 52.32,16.31 51.46,16.31 50.39,15.24
  Bottom 0.178: 59.99,26.31 59.99,29.36 U10.VCC | U12.3 50.82,13.6 50.39,13.87 50.39,15.24
  Bottom 0.254: J10.VCC J11.VCC J12.VCC J14.VCC | J16.1 64.22,36.21 v64.22,43.63
+12V  (via drill 0.35)
  Top 0.152: U13.4 68.89,29.41 67.92,29.41 v66.75,28.25 | C29.P$2 55.8,25.28 v55.83,25.25
  Bottom 0.152: v66.75,28.25 66.34,28.25 65.38,27.28 65.13,27.28 64.11,26.26 64.11,23.77 62.94,22.61 57.71,22.61 56.24,24.07 56.24,24.08 55.83,24.49 v55.83,25.25 55.83,26.38 U14.2
ECHO1
  Top 0.254: J19.ECHO 47.04,50.04 45.01,48.01 45.01,28.09 U10.D3
ECHO2
  Bottom 0.254: U10.D5 45.01,23.01 45.01,45.57 46.18,46.74 47.52,46.74 47.58,46.79 47.65,46.79 48.26,47.4 48.26,49.43 49.07,50.24 49.55,50.24 J10.ECHO
ECHO3
  Top 0.178: J11.ECHO 52.32,50.44 50.9,49.02 50.9,44.14 50.49,43.74 50.09,43.74 49.07,42.72 49.07,42.14 49.19,42.02 49.19,18.55 U10.D7
ECHO4  (via drill 0.35)
  Top 0.178: J12.ECHO 55.02,50.09 53.54,48.62 53.54,44.35 v52.12,42.93
  Bottom 0.152: 52.01,42.02 52.01,36.31 49.12,33.43 49.12,26.11 50.04,25.2 50.7,25.2 52.12,23.77 52.12,21.13 52.93,20.32 52.93,18.49 52.02,17.58 50.34,17.58 50.12,17.36
  Bottom 0.178: v52.12,42.93 52.12,42.14 52.01,42.02 | 50.12,17.36 49.28,16.51 49.28,15.9 48.16,14.83 48.16,12.5 U10.D9
ECHO5  (via drill 0.35)
  Top 0.178: v58.42,43.54 58.62,43.54 59.43,42.73 | 59.43,42.73 59.44,42.72 | v58.01,25.45 58.01,22.71 U10.D13 | v58.83,39.67 59.43,40.28 59.43,42.73
  Bottom 0.178: J13.ECHO 60.38,50.16 59.03,48.82 59.03,46.79 58.83,46.58 58.83,45.84 58.84,45.83 58.84,43.95 v58.42,43.54 | v58.01,25.45 59.44,26.87 59.44,30.94 58.62,31.75 58.62,34.59 58.83,34.8 v58.83,39.67
ECHO6  (via drill 0.35)
  Top 0.178: J14.ECHO 57.71,50.34 56.18,48.82 56.18,43.33 v55.98,43.13 | v57,24.64 57,18.95 57.2,18.75 59.44,18.75 U10.D12
  Bottom 0.178: v55.98,43.13 56.18,43.13 57,42.32 v57,24.64
ECHO7  (via drill 0.35)
  Top 0.152: v63.5,24.18 63.5,20.42 v63.25,20.17 | v60.15,16.31 60.15,15.49 U10.D11
  Bottom 0.152: J15.ECHO 63.25,50.44 64.36,49.33 64.36,44.7 63.65,43.99 63.65,24.33 v63.5,24.18 | v63.25,20.17 63.25,17.78 62.89,17.42 61.27,17.42 v60.15,16.31
ECHO8  (via drill 0.35)
  Top 0.152: 67.16,17.93 67.67,18.44 69.04,18.44 69.9,19.3 v69.9,21.74
  Top 0.178: J18.ECHO 65.73,50.24 66.95,49.02 66.95,47.4 67.77,46.53 67.77,43.28 68.38,42.72 68.89,42.72 69.89,41.71 69.89,32.41 69.18,31.7 v69.14,31.7 | 67.16,17.93 67.16,13.06 v66.95,12.85
  Bottom 0.178: v66.95,12.85 66.14,12.85 65.94,12.65 63.6,12.65 U10.D10 | v69.14,31.7 69.9,30.94 v69.9,21.74
GIMBAL
  Bottom 0.152: R14.2 67.01,32.46 67.31,32.77 67.31,43.59 JP5.3
GND  (via drill 0.3, 0.35)
  Top 0.152: U6.38 11.31,58.3 11.73,58.72 11.73,59.94 11.58,60.1 | 11.58,60.1 U6.32 | U6.8 11.73,67.3 | 11.73,67.3 12.1,67.3 12.75,66.65 13.22,66.65 C10.1 | 11.58,60.1 11.58,61.82 11.53,61.87 10.35,61.87 U6.26 | v18.49,30.63 18.49,30.34 C1.2 | 11.73,67.3 11.73,65.96 11.69,65.92 11.69,65.64 | 11.69,65.64 11.53,65.48 10.35,65.48 U6.14 | 11.69,65.64 11.69,63.76 11.58,63.65 10.38,63.65 U6.20 | U9.4 26.07,24.43 v25.71,24.79 | U6.79 3.83,42.4 v3.91,42.32 | U6.25 1.45,62.2 1.27,62.03 1.27,60.71 | 1.27,60.71 1.63,60.35 2.47,60.35 U6.31 | 1.27,60.71 1.27,58.78 1.47,58.57 2.5,58.57 U6.37 | U6.74 11.29,43.9 11.63,44.25 11.63,45.36 | 11.63,45.36 11.33,45.67 10.36,45.67 U6.68 | 11.63,45.36 11.63,47.19 | 11.63,47.19 11.33,47.5 U6.62 | 11.63,47.19 11.63,48.97 11.28,49.33 10.35,49.33 U6.56 | v1.02,51.36 2.48,51.36 U6.49
  Bottom 0.152: U7.8 19.88,32.09 19.76,32.21 U7.EP 20.01,33.09 U7.6 21.15,33.09 v21.84,33.78 | U5.6 18.36,21.16 | U5.3 18.36,21.16 | 18.36,21.16 U5.17 17.86,21.66 U5.14 U5.15 18.36,24.37 C8.1 | C4.1 3.5,48.77 4.17,49.43 5.38,49.43 U4.10 | J8.6 5.53,59.17 v5.64,59.28 | U1.18 26.52,21.17 26.55,21.14 26.98,21.14 27.03,21.18 27.08,21.18 27.08,21.71 U1.20 | U1.11 27.09,18.25 26.77,17.93 25.86,17.93 v25.65,17.73 | U8.4 19.53,27.44 18.8,28.17 18.8,30.33 v18.49,30.63 | v3.91,42.32 4.28,42.79 4.28,43.59 4.42,43.73 4.94,43.73 U4.7 | 19,19.05 18.85,19.2 18.85,20 U5.5 | J5.P$1 1.35,51.02 v1.02,51.36
  other vias: 31.5,33.99 22.61,19.25 6.76,61.52 5.99,67.97 4.06,49.58 15.9,73.91 15.85,23.37
  pour Top: 0.15,75.18 37.29,75.54 37.49,0.2 0.15,0.15
  pour Bottom: 0.2,75.23 37.39,75.49 37.49,0.15 0.2,0.1
GND1  (via drill 0.35)
  Top 0.254: v60.86,27.69 60.86,29.5 59.84,30.52 59.84,31.19 60.2,31.54 60.25,31.54 v60.66,31.95
  Bottom 0.254: U12.EP 53.26,14 52.63,14.63 51.89,14.63 U12.5 U12.6
  other vias: 58.62,13.06 58.22,8.38 63.09,43.33 65.13,43.94 53.29,21.29 51.66,20.62 51.82,16.97 59.79,11.13
  pour Top: 45.36,55.02 71.68,54.76 71.68,0.41 45.11,0.15
  pour Bottom: 45.31,54.97 71.58,54.97 71.58,0.41 45.31,0.15
GND2
  Top 0.152: U15.18 59.95,66.96 59.92,66.94 59.52,66.94 59.44,66.85 59.44,67.46 U15.20
  pour Top: 46.89,74.94 71.69,74.94 71.69,59.94 46.89,59.94
  pour Bottom: 46.69,75.14 71.69,75.14 71.69,59.94 46.69,59.94
I2C_SCL  (via drill 0.3, 0.35)
  Top 0.152: v5.03,67.31 4.72,67.31 3.81,66.4 U6.11 | v3.2,56.95 7.06,56.95 v9.55,54.46 | v20.42,26.62 20.42,26.14 20.22,25.94 20.22,25.4 20.52,25.1 25.04,25.1 25.35,25.4 25.96,25.4 26.37,24.99 26.37,24.84 26.47,24.74 U9.3 | v18.85,45.01 17.02,45.01 v15.24,46.79
  Bottom 0.152: J7.1 33.76,43.99 32.61,43.99 32.31,44.3 32.31,45.47 30.48,47.29 20.93,47.29 18.85,45.21 v18.85,45.01 18.85,43.69 18.26,43.1 U4.19 17.34,43.03 16.19,43.03 15.8,42.64 15.8,36.63 14.28,35.1 14.28,31.45 14.99,30.73 16.87,30.73 18.49,29.11 18.49,28.04 19.91,26.62 v20.42,26.62 20.42,26.82 20.52,26.92 U8.3 | v5.03,67.31 4.62,66.9 4.5,66.9 3.95,66.36 1.41,66.36 1.12,66.07 1.12,57.35 2.8,57.35 v3.2,56.95 | v15.24,46.79 15.24,48.51 15.8,49.07 15.8,49.73 11.07,54.46 v9.55,54.46
I2C_SCL_1V1  (via drill 0.35)
  Top 0.152: U15.23 58.18,68.61 v57.86,68.94
  Bottom 0.152: v57.86,68.94 57.86,69.85 JP6.3
I2C_SCL_1V8  (via drill 0.35)
  Top 0.152: U9.6 26.07,22.6 26.33,22.34 27.83,22.34 v28.3,22.81
  Bottom 0.152: U1.23 28.3,21.73 v28.3,22.81 28.3,23.65 28.2,23.75 28.2,24.21 28.3,24.31 28.3,27.21 28.16,27.35 28.16,28.22 28.77,28.84 30.87,28.84 JP3.3
I2C_SCL_5V  (via drill 0.3)
  Top 0.152: v20.73,30.38 21.64,30.38 26.52,35.25 27.89,35.25 J6.1
  Bottom 0.152: 28.75,35.64 J3.1 | 28.75,35.64 J6.1 | J2.1 27.46,43.51 25.96,42.01 25.96,36.88 26.62,36.22 28.17,36.22 28.75,35.64 | U8.6 20.12,29.78 v20.73,30.38
I2C_SDA  (via drill 0.3, 0.35)
  Top 0.152: 1.63,67 U6.9 3.55,67 v4.22,67.67 | 15.75,44.09 15.7,44.04 v15.65,44.09 14.83,43.28 14.43,43.28 14.07,42.93 14.07,36.28 13.16,35.36 v13.16,34.09 | U9.2 27.08,24.38 27.08,25.04 26.42,25.71 v20.78,25.71
  Bottom 0.152: J7.2 32.49,47.8 20.42,47.8 17.41,44.79 U4.18 17.3,44.09 v15.65,44.09 14.63,45.11 14.07,45.11 11.58,47.6 11.58,49.94 11.89,50.24 11.89,51 7.77,55.12 6.91,55.12 6.35,55.68 1.57,55.68 0.82,56.43 0.82,56.48 0.81,60.02 0.81,66.19 2.29,67.67 v4.22,67.67 | U8.2 20.92,27.23 21.18,26.98 21.18,26.11 v20.78,25.71 20.37,25.71 18.19,27.89 18.19,28.85 16.71,30.33 14.93,30.33 14.93,30.35 13.57,31.72 13.57,33.68 v13.16,34.09
I2C_SDA_1V1  (via drill 0.35)
  Top 0.152: U15.24 57.78,67.84 v56.84,68.78
  Bottom 0.152: v56.84,68.78 56.84,71.37 JP6.2
I2C_SDA_1V8  (via drill 0.35)
  Top 0.152: U9.7 26.47,22.91 26.67,22.71 27.41,22.71 28.07,23.37 28.14,23.37 v28.75,23.98 28.75,25.25 30.38,26.87 30.38,30.89 JP3.2
  Bottom 0.152: v28.75,23.98 28.75,23.14 28.85,23.04 28.85,21.88 U1.24
I2C_SDA_5V  (via drill 0.3)
  Top 0.152: v21.34,29.57 22.35,29.57 25.36,32.57 25.36,32.69 26.8,34.13 28.22,34.13 28.32,34.04 30.1,34.04 J3.2
  Bottom 0.152: 31.24,38.18 J3.2 | 31.24,38.18 J6.2 | J2.2 30.1,46.05 31.19,44.96 31.19,38.23 31.24,38.18 | U8.7 20.52,28.75 v21.34,29.57
ID_SD  (via drill 0.35)
  Top 0.152: U6.3 7.08,68.8 v7.26,68.99
  Bottom 0.152: v7.26,68.99 10.92,68.99 11.43,68.48 15.29,68.48 15.85,67.92 29.77,67.92 34.75,62.94 36.32,62.94 U11.CH_PD
LED1  (via drill 0.35)
  Top 0.152: v12.29,25.25 16.61,20.93 25.65,20.93 26.98,19.61 28.4,19.61 29.31,20.52 29.31,24.21 29.21,24.31 29.21,24.84 29.52,25.15 29.54,25.15 30,25.6 30.12,25.6 JP2.1 | U6.57 2.55,49.02 3.71,49.02 3.71,48.75 3.84,48.63 3.91,48.54 3.91,48.53 4.85,47.45 4.93,47.37 4.93,47.36 4.94,47.35 4.93,47.23 4.83,33.17 4.83,32.86 v5.18,32.51
  Bottom 0.152: v12.29,25.25 12.29,25.3 v5.18,32.51
LED2  (via drill 0.35)
  Top 0.152: JP2.2 30.12,25.3 29.57,24.74 29.57,24.38 29.61,24.33 29.61,20.39 28.52,19.3 26.85,19.3 25.57,20.59 15.79,20.59 v12.04,24.33 | v5.13,31.34 4.52,31.9 4.62,47.24 3.61,48.41 2.54,48.41 U6.59
  Bottom 0.152: v12.04,24.33 12.04,24.44 v5.13,31.34
LED3  (via drill 0.35)
  Top 0.152: JP2.3 30.89,22.76 29.92,21.79 29.92,20.27 28.65,19 26.72,19 25.44,20.28 15.07,20.28 v11.99,23.37 | U6.64 10.31,46.89 8.84,46.89 7.96,46.01 7.96,37.3 7.37,36.7 7.37,31.8 5.77,30.2 5.77,30.15 v5.44,29.82
  Bottom 0.152: v11.99,23.37 6.15,29.21 6.1,29.21 v5.44,29.82
LED4  (via drill 0.35)
  Top 0.152: JP2.4 30.43,20.22 29.92,19.71 29.79,19.71 28.78,18.69 26.52,18.69 25.35,19.86 14.48,19.86 v12.04,22.3 | v5.49,28.65 5.49,28.91 6.04,29.46 | 6.04,29.46 6.07,29.49 | U6.66 10.3,46.28 9.25,46.28 8.28,45.31 8.28,37.19 7.79,36.64 7.79,31.74 6.07,30.07 6.07,30.02 6.04,30 6.04,29.46
  Bottom 0.152: v12.04,22.3 11.94,22.3 5.99,28.25 5.89,28.25 v5.49,28.65
MOTOR1  (via drill 0.35)
  Top 0.152: v24.69,35.25 24.03,35.31 23.57,35.76 23.57,36.17 23.11,36.63 23.06,36.63 20.22,39.47 14.93,39.47 v14.88,39.52 | v7.21,50.44 9.04,50.44 9.14,50.55 10.28,50.55 U6.52 | v34.04,33.27 34.04,31.45 34.09,31.4 34.09,29.59 U$12.1
  Bottom 0.152: U$12.1 35.56,27.84 | v14.88,39.52 14.78,39.52 8.28,46.02 8.28,49.38 v7.21,50.44 | v24.69,35.25 24.69,35 26.72,32.97 33.73,32.97 v34.04,33.27
MOTOR2  (via drill 0.35)
  Top 0.152: U6.54 7.79,49.9 v7.31,49.43 | v14.78,38.66 15.44,38.66 15.85,39.06 19.84,39.06 23.9,35 23.98,35 v24.54,34.34
  Bottom 0.152: v7.31,49.43 7.57,49.43 7.98,49.02 7.98,45.47 v14.78,38.66 | v24.54,34.34 24.54,34.24 26.11,32.66 36.17,32.66 36.93,31.9 36.93,28.33 36.96,28.3 36.96,26.42 U$12.2
MOTOR3  (via drill 0.35)
  Top 0.152: v23.93,33.73 23.93,34.09 20.68,37.34 20.68,37.54 19.61,38.61 15.82,38.61 15.57,38.35 15.39,38.35 v15.04,37.79 | v7.16,48.56 8.89,48.56 9.04,48.72 10.31,48.72 U6.58
  Bottom 0.152: v15.04,37.79 14.73,38.1 14.55,38.1 14.23,38.43 14.23,38.66 7.57,45.31 7.57,48.16 v7.16,48.56 | U$12.3 34.44,24.16 34.44,27.43 34.39,27.48 34.39,31.57 33.6,32.36 27.3,32.36 27.25,32.31 25.35,32.31 v23.93,33.73
MOTOR4  (via drill 0.35)
  Top 0.152: U6.60 7.87,48.1 7.37,47.6 7.37,46.28 v6.96,45.87 | v14.88,36.93 15.29,37.03 16.56,38.3 19.36,38.3 20.37,37.29 20.37,36.07 v23.42,33.02
  Bottom 0.152: v6.96,45.87 6.96,45.16 13.87,38.25 13.87,38.05 v14.88,36.93 | v23.42,33.02 23.93,32.97 24.89,32 27.38,32 27.43,32.05 33.48,32.05 34.09,31.45 34.09,21.97 U$12.4
N$1
  Bottom 0.152: L1.P$1 3.31,49.69 4.22,50.6 | 4.22,50.6 5.31,50.6 U4.11 | 4.22,50.6 4.22,51.82 J5.P$3
N$2
  Bottom 0.152: C6.2 17.46,18.63 17.88,19.05 17.88,19.99 U5.7
N$3
  Bottom 0.152: C6.1 16.31,19.1 17.07,19.1 17.32,19.36 17.32,19.98 U5.8
N$4
  Bottom 0.152: R32.1 14.46,5.76 D1.A
N$5  (via drill 0.35)
  Top 0.152: R1.2 14.68,24.38 v13.56,25.5
  Bottom 0.152: U5.13 17.36,25.26 17.12,25.5 v13.56,25.5 13.11,25.5 11.79,26.82 11.79,28.04 12.39,28.65 13.73,28.65 U3.6
N$6  (via drill 0.35)
  Top 0.152: v18.29,32.21 16.97,32.21 13.96,29.2 | 13.96,29.2 v12.45,27.69 | R2.2 13,30.16 13.96,29.2
  Bottom 0.152: U7.2 18.67,32.59 v18.29,32.21 | v12.45,27.69 13.74,27.69 U3.5
N$7  (via drill 0.35)
  Top 0.152: R3.1 32.51,48.82 v32.82,49.12
  Bottom 0.152: v32.82,49.12 32.82,50.84 U11.CS0
N$8  (via drill 0.35)
  Top 0.152: R5.1 29.92,51.21 v30.84,52.12
  Bottom 0.152: v30.84,52.12 U11.MISO
N$9  (via drill 0.35)
  Top 0.152: R6.1 27.84,49.68 v28.14,49.99
  Bottom 0.152: v28.14,49.99 28.14,50.16 U11.GPIO9
N$10  (via drill 0.35)
  Top 0.152: R7.1 v26.72,52.27
  Bottom 0.152: v26.72,52.27 26.72,50.98 U11.GPIO10
N$11
  Bottom 0.152: C5.2 26.91,17.46 27.48,18.03 U1.10
N$12
  Bottom 0.152: U2.2 13.17,70.04 13.41,69.8 15.34,69.8 15.65,70.1 16.4,70.1 C15.2
N$13
  Bottom 0.152: R12.1 3.73,44.78 4.93,45.97 6.2,45.97 7.06,46.84 7.06,47.7 6.5,48.26 5.45,48.26 U4.9
N$14  (via drill 0.35)
  Top 0.152: R8.1 v24.08,50.9
  Bottom 0.152: v24.08,50.9 24.8,50.9 U11.MOSI
N$15  (via drill 0.35)
  Top 0.152: R9.1 21.03,53.29 v22.1,52.22
  Bottom 0.152: v22.1,52.22 22.1,51.61 U11.SCLK
N$16  (via drill 0.35)
  Top 0.178: R10.1 51.1,14.38 v51,14.48
  Top 0.254: 49.73,15.9 49.07,15.9 48.56,15.39 48.56,11.7 C27.2 | 49.73,15.9 R11.1 | R10.1 52.01,14.75 51.1,15.65 49.99,15.65 49.73,15.9
  Bottom 0.178: v51,14.48 51.1,14.27 51.31,14.07 51.83,14.07 U12.4
N$17  (via drill 0.35)
  Top 0.254: C25.2 54.46,11.73 v54.66,11.84
  Bottom 0.254: v54.66,11.84 U12.12
N$18  (via drill 0.35)
  Top 0.254: v54.05,16.31 53.03,15.29 53.03,14.99 53,14.95 53,13.59 52.49,13.08 52.49,12.07 C25.1 52.01,10.5 v51.36,9.86 | v53.64,7.06 53.64,6.97 L4.2
  Bottom 0.254: U12.8 U12.7 54.66,15.7 v54.05,16.31 | v51.36,9.86 51.36,9.35 v53.64,7.06
N$19  (via drill 0.35)
  Top 0.178: v50.9,12.24 50.9,10.46 v50.19,9.75
  Bottom 0.178: R13.2 50.7,10.21 v50.19,9.75 | 51.85,13.11 U12.2 51.35,13.1 50.9,12.65 v50.9,12.24
N$20  (via drill 0.35)
  Top 0.152: v65.84,30.18 64.87,30.18 U13.1
  Bottom 0.152: R14.1 65.9,30.11 v65.84,30.18
N$21
  Top 0.152: U13.3 70.06,26.88 JP4.1
N$22
  Top 0.152: U15.10 58.98,62.81 C31.2
N$26
  Bottom 0.152: R12.2 1.92,45.11 C4.2 2.83,46.7 2.18,47.35 2.18,48.56 L1.P$2
N$29
  Bottom 0.152: C7.2 16.59,20.54 U5.9
N$30
  Bottom 0.152: 21.52,20.29 L2.P$1 | U5.1 U5.2
  Bottom 0.254: U5.2 20.15,21.66 21.52,20.29
N$32
  Bottom 0.152: U7.1 19.06,32.07 18.19,31.19 16.05,31.19 15.44,31.8 15.44,32.48 L3.P$1
N$48
  Bottom 0.152: U7.5 20.46,33.67 C18.1
N$53
  Top 0.152: R45.1 11.94,15.95 11.68,15.7 U6.168
POWER_SEQ_EN  (via drill 0.35)
  Top 0.152: R4.2 17.11,27.09 v17.58,26.62
  Bottom 0.152: v17.58,26.62 16.4,26.62 U3.3
SCL
  Top 0.254: U10.A5 58.22,32.97 60.45,35.2 63.09,35.2 63.91,36.02 63.91,38.72 65.02,39.83 65.63,39.83 J17.1
SD_CLK  (via drill 0.3)
  Top 0.152: R9.2 16.97,53.29 11.94,48.26 11.94,39.47 v11.84,39.37 | v1.07,43.64 2.49,43.64 U6.75
  Bottom 0.152: v11.84,39.37 11.84,39.32 9.3,36.78 4.61,36.78 4.28,37.11 4.28,40.88 3.15,42.01 2.69,42.01 v1.07,43.64
SD_CMD  (via drill 0.3)
  Top 0.152: R3.2 12.93,48.82 12.24,48.13 12.24,39.72 12.37,39.59 12.37,38.75 v12.23,38.62 | v1.02,42.82 1.22,42.82 1.37,42.98 2.5,42.98 U6.77
  Bottom 0.152: v12.23,38.62 11.57,38.62 9.42,36.47 4.48,36.47 3.98,36.98 3.98,39.86 v1.02,42.82
SD_D0  (via drill 0.3)
  Top 0.152: R5.2 25.04,51.21 24.74,51.51 21.74,51.51 21.44,51.82 16.21,51.82 14.02,49.63 v14.02,49.43 | U6.81 1.18,41.8 v1.02,41.96 | v12.19,37.79 12.19,37.82 12.77,38.4 12.77,39.62 12.55,39.84 12.55,47.4 v13.16,48.01
  Bottom 0.152: v1.02,41.96 1.42,41.96 3.67,39.71 3.67,36.85 4.36,36.17 9.55,36.17 11.18,37.79 v12.19,37.79 | v13.16,48.01 13.16,48.56 v14.02,49.43
SD_D1  (via drill 0.3)
  Top 0.152: U6.83 1.01,41.2 v0.95,41.15 | v12.24,36.98 12.24,37.09 13.07,37.92 13.07,39.75 12.85,39.97 12.85,47.09 13.08,47.09 v14.28,48.28 | v15.04,49.63 16.26,50.85 18.89,50.85 R8.2
  Bottom 0.152: v0.95,41.15 1.78,41.15 3.37,39.56 3.37,36.73 4.23,35.86 9.68,35.86 10.79,36.98 v12.24,36.98 | v14.28,48.28 14.28,48.87 v15.04,49.63
SD_D2  (via drill 0.3)
  Top 0.152: U6.87 1.04,40 v1.02,39.98 | v13.16,37.13 13.16,37.57 13.38,37.79 13.38,39.88 13.16,40.1 13.16,46.74 14.17,47.75 14.5,47.75 15,48.26 v19.41,48.26 | v21.34,49.35 21.67,49.68 R6.2
  Bottom 0.152: v1.02,39.98 2.49,39.98 3.05,39.42 3.05,36.61 4.1,35.56 9.8,35.56 10.77,36.52 11.95,36.52 12.02,36.45 12.47,36.45 v13.16,37.13 | v19.41,48.26 20.5,49.35 v21.34,49.35
SD_D3  (via drill 0.3)
  Top 0.152: U6.89 1.2,39.4 v0.96,39.17 | v13.31,36.27 13.31,36.32 13.77,36.78 v13.77,46.43 13.77,46.58 | v12.25,49.32 12.39,49.32 17.17,54.1 21.53,54.1 R7.2
  Bottom 0.152: v0.96,39.17 2.34,39.17 2.74,38.76 2.74,36.49 3.98,35.25 9.93,35.25 10.79,36.12 13.16,36.12 v13.31,36.27 | v13.77,46.43 13.31,46.43 12.19,47.55 12.19,49.27 v12.25,49.32
SDA
  Top 0.254: 58.32,27.58 U10.A4 59.44,28.8 59.44,31.75 60.25,32.56 62.89,32.56 64.52,34.19 64.52,36.17 J17.2
SDX_CLK  (via drill 0.35)
  Top 0.152: v8.69,66.45 8.99,66.45 9.25,66.7 U6.10
  Bottom 0.152: J8.5 4.04,60.27 3.66,60.65 3.66,65.63 4.62,66.6 8.53,66.6 v8.69,66.45
SDX_CMD  (via drill 0.35)
  Top 0.152: U6.12 9.2,66.09 8.79,65.68 8.79,65.18 7.21,63.6 7.21,62.94 v7.11,62.84
  Bottom 0.152: J8.3 6.75,62.47 v7.11,62.84
SDX_D0  (via drill 0.35)
  Top 0.152: v7.42,58.67 7.42,62.13 7.67,62.38 7.67,63.45 9.09,64.87 10.3,64.87 U6.16
  Bottom 0.152: J8.7 5.58,58.07 5.94,57.71 6.45,57.71 v7.42,58.67
SDX_D1  (via drill 0.35)
  Top 0.152: v8.43,58.47 8.43,61.54 8.13,61.85 8.13,63.32 8.46,63.65 8.53,63.65 9.2,64.31 U6.18
  Bottom 0.152: J8.8 6.94,56.97 v8.43,58.47
SDX_D2  (via drill 0.35)
  Top 0.152: v8.69,63.09 U6.22
  Bottom 0.152: J8.1 7.11,64.67 v8.69,63.09
SDX_D3  (via drill 0.35)
  Top 0.152: v8.69,62.18 8.99,62.28 9.2,62.48 10.31,62.48 U6.24
  Bottom 0.152: J8.2 7.39,63.57 v8.69,62.18
SERVO1  (via drill 0.35)
  Top 0.152: v24.49,36.83 24.08,36.78 20.68,40.18 16.26,40.18 v15.19,41.3 | v6.55,52.58 2.55,52.58 U6.45 | JP1.1 27.81,29.19 27.48,29.19 26.52,30.15 26.52,32 v28.04,33.52
  Bottom 0.152: v15.19,41.3 14.07,41.25 8.99,46.33 8.99,50.14 v6.55,52.58 | v24.49,36.83 25.15,36.83 26.54,35.44 26.54,35.23 28.04,33.73 v28.04,33.52
SERVO2  (via drill 0.35)
  Top 0.152: U6.47 6.16,52 v6.81,51.36 | v15.09,40.39 15.65,40.34 16.15,39.83 20.42,39.83 v24.18,36.02 | JP1.2 25.66,28.8 25.66,32.21 v27.03,33.58
  Bottom 0.152: v6.81,51.36 7.21,51.36 8.64,49.94 8.64,46.18 14.07,40.74 14.73,40.74 v15.09,40.39 | v24.18,36.02 24.74,36.07 25.45,36.07 26.24,35.28 26.24,35.1 27.03,34.31 v27.03,33.58
SERVO3  (via drill 0.35)
  Top 0.152: v70.77,33.83 70.77,39.17 70.87,39.27 70.87,46.94 JP5.2
  Top 0.254: v70,16.92 70,13.46 69.39,12.85 69.27,12.85 69.12,12.7 67.66,12.7 67.21,12.25 66.25,12.25 J21.1
  Bottom 0.152: v70,16.92 70,19.3 70.82,20.12 70.82,31.45 v70.77,33.83
SERVO4
  Top 0.152: 70.21,32.23 70.21,43.17 68.22,45.16 68.22,49.58 JP5.1
  Top 0.178: J20.1 70.61,13.31 70.61,17.53 70.97,17.88 70.97,30.79 70.95,30.8 70.95,30.98 70.21,31.72 70.21,32.23
SPI_CS0  (via drill 0.35)
  Top 0.152: U6.27 4.25,61.6 5.03,62.38 5.03,63.8 5.03,65.63 8.03,68.63 8.03,71.22 v10.62,73.81
  Bottom 0.152: v10.62,73.81 10.62,72.92 U2.5
SPI_MISO  (via drill 0.3)
  Top 0.152: v11.89,73.86 11.45,73.86 10.85,73.26 10.49,73.26 8.34,71.11 8.34,68.44 5.38,65.48 5.38,62.31 4.38,61.3 4.05,61.3 3.71,60.96 2.57,60.96 U6.29
  Bottom 0.152: U2.6 11.92,73.83 v11.89,73.86
SPI_MOSI  (via drill 0.3)
  Top 0.152: v13.16,73.86 12.85,73.86 12.09,73.1 11.12,73.1 10.97,72.95 10.63,72.95 8.65,70.97 8.65,68.31 5.69,65.36 5.69,61.72 3.76,59.79 2.54,59.79 U6.33
  Bottom 0.152: U2.7 13.17,73.85 v13.16,73.86
SPI_SCLK  (via drill 0.3)
  Top 0.152: v14.38,73.86 14.07,73.86 13.11,72.9 12.32,72.9 12.07,72.65 10.76,72.65 8.96,70.85 8.96,68.19 5.99,65.23 5.99,61.47 3.76,59.23 2.56,59.23 U6.35
  Bottom 0.152: U2.8 14.42,73.82 v14.38,73.86
TRIG1
  Top 0.254: J19.TRIG 46.53,47.9 45.41,46.79 45.41,30.23 U10.D2
TRIG2
  Bottom 0.254: J10.TRIG 49.76,47.88 48.46,46.58 48.46,44.75 47.04,43.33 46.02,43.33 45.62,42.93 45.62,42.52 45.41,42.32 45.41,25.15 U10.D4
TRIG3  (via drill 0.35)
  Top 0.178: J11.TRIG 51.82,47.9 51.31,47.4 51.31,45.87 51.23,45.79 51.23,44.01 50.93,43.71 50.93,42.82 51.73,42.02 51.73,41.09 51.06,40.42 50.63,40.42 49.68,39.47 49.68,20.17 v50.09,20.17
  Bottom 0.152: U10.D6 46.79,19.3 47.85,20.37 49.48,20.37 v50.09,20.17
TRIG4
  Top 0.178: J12.TRIG 54.86,47.9 53.95,46.99 53.95,45.9 53.89,45.83 53.89,43.19 54.36,42.72 54.36,28.09 50.9,24.64 50.9,19.76 48.46,17.32 48.46,16.31 48.06,15.9 48.06,14.88 U10.D8
TRIG5  (via drill 0.35)
  Top 0.178: v60.45,30.94 60.45,30.43 U10.A0
  Bottom 0.178: J13.TRIG 60.38,47.52 59.23,46.38 59.23,42.93 59.44,42.72 59.44,31.95 v60.45,30.94
TRIG6  (via drill 0.35)
  Top 0.152: 57,42.72 57.02,42.71
  Top 0.178: J14.TRIG 56.59,46.79 56.59,45.84 56.58,45.83 56.58,43.14 57,42.72 | U10.A1 61.77,26.06 57.81,26.06 57.35,26.52 57,26.87 56.39,27.48 v56.39,28.55 | 56.95,42.77 57.02,42.71 57.09,42.63 57.09,41.09 57.1,41.07 57.1,33.63 56.18,32.71 v56.18,32.51
  Bottom 0.178: v56.39,28.55 56.18,28.75 v56.18,32.51
TRIG7
  Bottom 0.178: J15.TRIG 63.04,47.75 61.87,46.58 61.87,42.72 63.3,41.3 63.3,25.04 U10.A2
TRIG8  (via drill 0.35)
  Top 0.152: J18.TRIG 65.73,47.7 67.31,46.13 67.31,42.98 66.85,42.37 63.91,42.37 62.13,40.59 61.67,40.59 60.5,39.42 60.5,35.86 59.84,35.2 59.79,35.2 56.29,31.7 | 56.29,26.26 57.66,24.89 57.66,22.61 59.99,20.27 v59.99,19.71
  Top 0.178: 56.29,31.7 55.82,31.23 55.82,28.31 55.83,28.3 55.83,26.72 56.29,26.26
  Bottom 0.152: v59.99,19.71 61.52,21.23 U10.A3
UART_RX  (via drill 0.3)
  Top 0.152: U6.53 2.54,50.19 4.27,50.19 5.89,48.56 5.89,34.81 v5.38,34.29
  Bottom 0.152: J9.1 34.04,4.32 10.72,4.32 6.76,8.28 6.6,8.28 4.93,9.96 4.93,12.5 4.32,13.11 2.85,13.11 1.63,14.33 1.63,31.65 4.27,34.29 v5.38,34.29
UART_TX  (via drill 0.3)
  Top 0.152: U6.51 4.21,50.8 6.25,48.77 6.25,48.21 6.3,48.16 6.3,33.88 v5.99,33.58
  Bottom 0.152: J9.2 31.95,4.78 10.92,4.78 5.74,9.96 5.74,11.84 5.69,11.89 5.69,12.5 4.62,13.56 3.3,13.56 2.13,14.73 2.13,30.38 2.18,30.38 | 2.13,30.07 2.13,30.33 2.18,30.38 | v5.99,33.58 5.69,33.27 5.08,33.27 3.06,31.26 2.18,30.38
USB_D_N  (via drill 0.3)
  Top 0.305: v13.16,17.91 13.16,18.16 20.38,18.16 21.87,16.67 21.87,15.86 J4.2 | v4.57,15.82 4.57,16.08 3.73,16.08 3.66,16 U6.167 | U6.167
  Bottom 0.305: v13.16,17.91 13.16,18.16 7.87,18.16 7.35,17.64 arc90 7.35,17.32 7.46,17.21 arc-90 7.46,16.89 6.73,16.17 arc-90 6.41,16.17 6.3,16.28 arc90 5.98,16.28 5.78,16.08 4.57,16.08 v4.57,15.82
USB_D_P  (via drill 0.3)
  Top 0.305: v13.16,18.87 13.16,18.62 20.57,18.62 22.33,16.86 22.33,16.64 22.61,16.36 v22.66,16.21 | v4.57,16.79 4.57,16.54 3.58,16.54 3.5,16.61 2.54,16.61 U6.165
  Bottom 0.305: v13.16,18.87 13.16,18.62 7.68,18.62 5.6,16.54 4.57,16.54 v4.57,16.79 | v22.66,16.21 22.61,15.99 J4.3
V_BATT  (via drill 0.35)
  Top 0.152: v50.44,18.19 53.8,18.19 55.8,16.18 C23.P$1
  Top 0.254: 55.8,13.36 56.54,13.36 v56.64,13.46
  Top 0.508: C23.P$1 55.8,13.36 C22.P$1 56.18,11.07 57.71,9.55 63.3,9.55 63.55,9.8 63.55,18.09 J22.1
  Bottom 0.152: C28.P$2 50.04,19.1 | 50.04,19.1 50.7,19.76 50.7,22.05 U14.3 | 50.04,19.1 50.04,18.59 v50.44,18.19
  Bottom 0.254: v56.64,13.46 55.83,13.46 55.52,13.77 54.83,13.77 | 54.83,13.77 U12.10 | 54.83,13.77 54.83,13.93 U12.9
VDD
  Bottom 0.178: U12.11 55.43,13.1 55.68,12.85 55.68,11.58 55.17,11.07 52.63,11.07 52.38,11.48 51.92,11.48 | 51.92,11.48 49.94,11.48 | U12.1 51.86,11.54 51.92,11.48
  Bottom 0.254: R13.1 49.94,11.48 49.94,12.69 C26.1
VOUT  (via drill 0.35)
  Top 0.254: 53.76,14.44 R10.2 53.76,13.78 52.98,13 52.98,12.51 52.9,12.42 52.9,10.22 v52.55,9.88 49.68,7.01 49.68,5.22 L4.1 49.77,7.06 C27.1
  Top 0.508: C21.+ 67.36,5.23 v69.14,7.01
  Bottom 0.254: J21.2 64.26,14.93 60.15,14.93 59.79,14.58 59.79,12.39 57.28,9.88 v52.55,9.88
  Bottom 0.508: v69.14,7.01 69.02,7.01 C24.P$2 69.39,8.28 70.41,9.3 70.41,13.11 69.65,13.87 J20.2 J21.2

## Text on the board
tPlace: 1V8 | GND | U1 | GND | E | T | GIMB | 2|SER|1 | VCC | J10 | U1 | U9 | - | + | J12 | J13 | L1 | C2
bPlace: U11 | U2 | SDA | SCL | J8 | I2C | J9 | 5V | M1 | U8 | S2 | S1 | J11 | BATT | M4 | J9 | SERVO1 | SERVO2 | J4 | POWER
tNames: Central Board v2 | SensA | Batt | SDA | SCL
bNames: PID | 5V | Gimb | SensB | U4 | Sensor Board A v2